# EAGLE board l298n_x1_v1 (EAGLE 5.06)
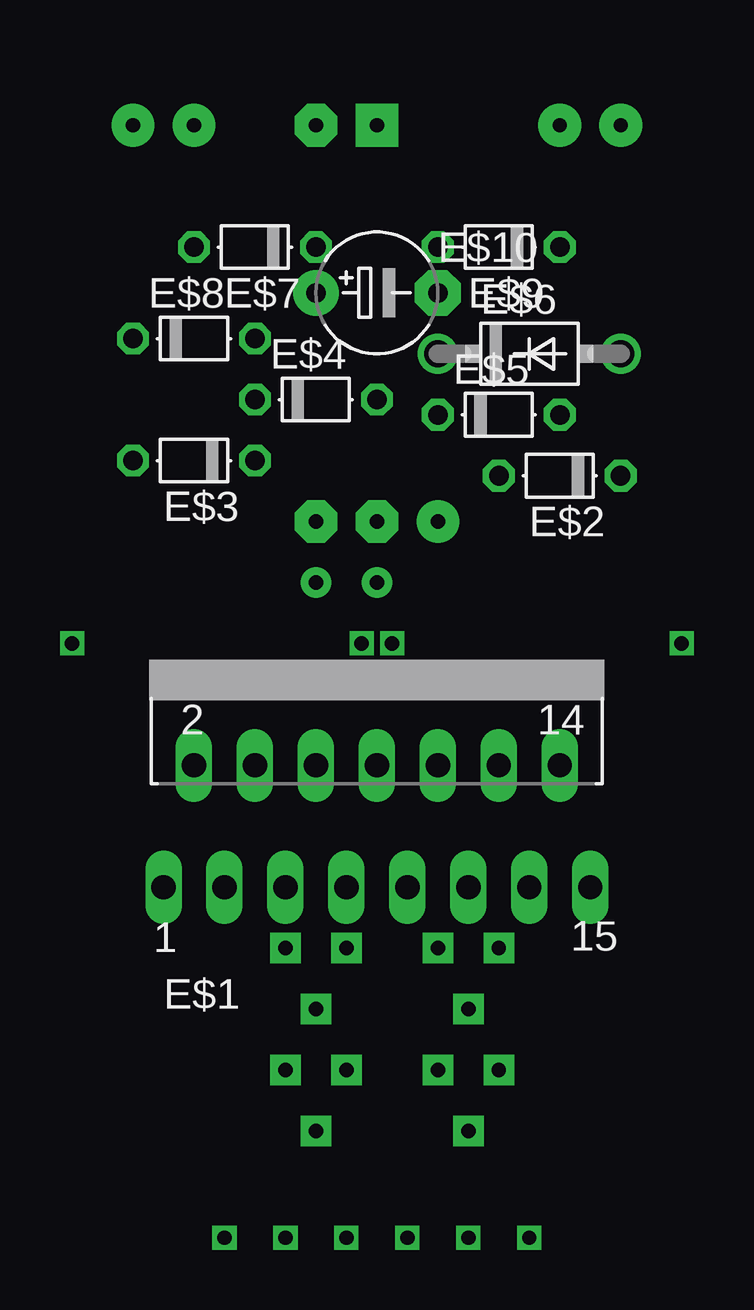
[diagram p0: board, top side]
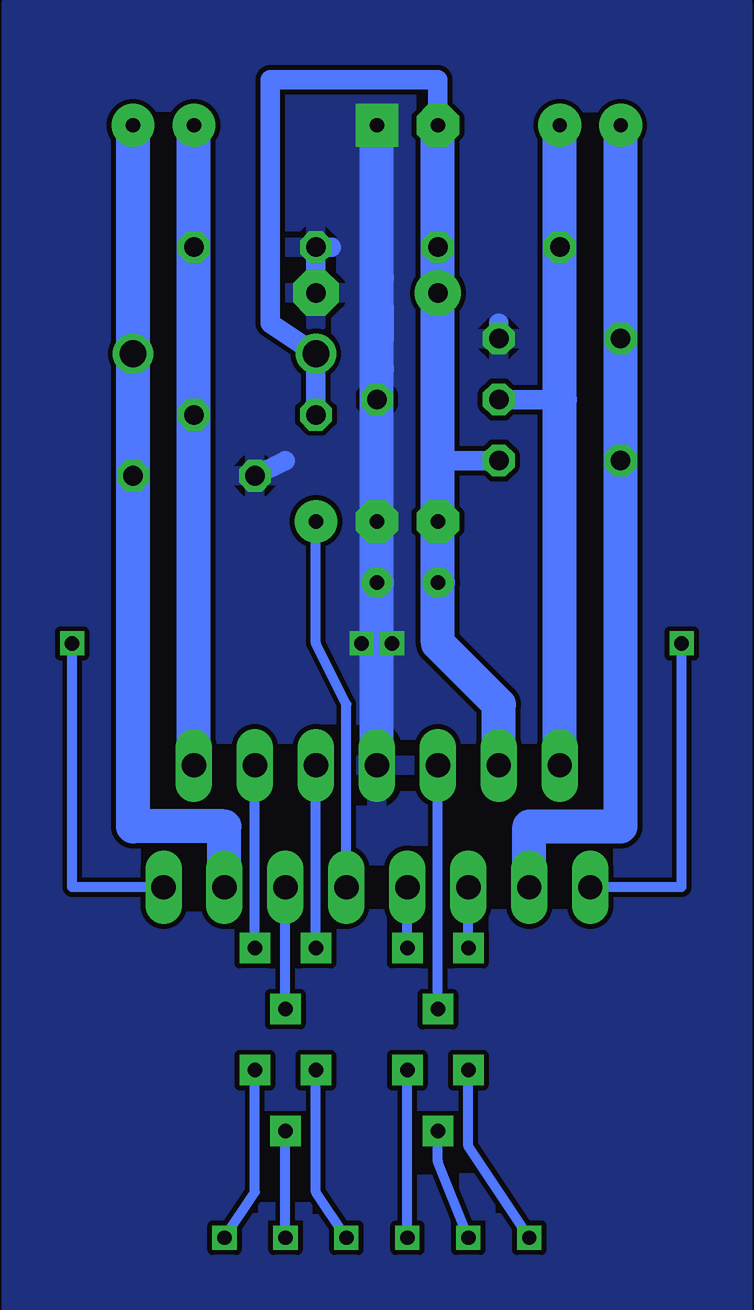
[diagram p1: board, bottom side, seen from below]

No outline drawn. Coordinates in mm, seen from the top.
Copper layers (1*16): Top 0.035mm / dielectric 1.5mm / Bottom 0.035mm
Design rules "default": minimum track width 10mil, minimum drill 24mil, track to track 8mil, track to pad 8mil, pad to pad 8mil, via to via 8mil, smd to smd 8mil, copper to edge 40mil, drill to drill 8mil, minimum pad ring 10mil, minimum via ring 8mil, stop-mask expansion 4mil, vias tented up to drill 0mil, thermal gap 10mil

## Footprints (pad centres in the part's own frame; a part is rotated, then mirrored left to right if it is on the bottom)
MULTIWATT-15 = drill 1.016 long: 1 -8.89,-7.62; 2 -7.62,-2.54; 3 -6.35,-7.62; 4 -5.08,-2.54; 5 -3.81,-7.62; 6 -2.54,-2.54; 7 -1.27,-7.62; 8 0,-2.54; 9 1.27,-7.62; 10 2.54,-2.54; 11 3.81,-7.62; 12 5.08,-2.54; 13 6.35,-7.62; 14 7.62,-2.54; 15 8.89,-7.62
D-5 = drill 0.813 octagon: A 2.54,0; C -2.54,0
DO41-7 = drill 1.118 round: A 3.81,0; C -3.81,0
E5-5 = drill 0.813 pad 1.905 round: + -2.54,0 | drill 0.813 pad 1.905 octagon: - 2.54,0

## Placement (x,y rotation side)
E$1  [MULTIWATT-15]  15.24,24.13 0 top
E$2  [D-5]  22.86,33.66 180 top
E$3  [D-5]  7.62,34.29 180 top
E$4  [D-5]  12.7,36.83 0 top
E$5  [D-5]  20.32,36.2 0 top
E$6  [DO41-7]  21.59,38.73 0 top
E$7  [D-5]  10.16,43.18 180 top
E$8  [D-5]  7.62,39.37 0 top
E$9  [D-5]  20.32,43.18 180 top
E$10  [E5-5]  15.24,41.27 0 top

## Library data of the parts
E$1 = ref-packages
E$2-E$9 = diode
E$10 = rcl

## Nets
GND: E$1.8 E$2.A E$8.A E$9.A E$10.-
S$1: E$1.1
S$2: E$1.15
S$4: E$1.3
S$5: E$1.2 E$4.C
S$6: E$1.4 E$3.C
S$7: E$1.14
S$9: E$1.6
S$11: E$1.12
S$12: E$1.11
S$13: E$1.10
S$14: E$1.13
S$15: E$1.9
S$18: E$1.5
S$20: E$1.7

## Tracks (layer width: path | path; a pad name or v marks a point on that pad's centre or on a via)
GND  (via drill 0.6, 0.6 pad 1.27, 0.6 pad 1.78)
  Bottom 0.813: E$8.A 10.16,40.01 | 17.14,43.18 E$9.A E$10.- | 19.05,34.29 E$2.A
  Bottom 1.422: 15.24,40.64 15.24,39.37 | 15.24,40.64 15.24,41.91 | 15.24,38.1 15.24,40.64 | 15.24,38.1 v15.24,48.26 | 15.24,38.1 v15.24,31.75 v15.24,29.21 E$1.8
  other vias: 14.61,26.67 15.88,26.67
  pour Bottom: 0,-1.27 0,53.34 30.48,53.34 30.48,-1.27
S$1  (via drill 0.6)
  Bottom 0.406: E$1.1 2.54,16.51 v2.54,26.67
S$2  (via drill 0.6)
  Bottom 0.406: E$1.15 27.94,16.51 v27.94,26.67
S$4  (via drill 0.6 pad 1.78)
  Bottom 1.422: v5.08,48.26 5.08,19.05 8.89,19.05 E$1.3
S$5  (via drill 0.6 pad 1.78)
  Bottom 0.813: 7.62,36.83 E$4.C
  Bottom 1.422: E$1.2 7.62,36.83 v7.62,48.26
S$6  (via drill 0.6 pad 1.27, 0.6 pad 1.78)
  Bottom 0.813: 17.78,36.83 17.78,38.73 19.68,40.01 19.68,50.16 12.7,50.16 v12.7,48.26 | 12.7,34.29 E$3.C
  Bottom 1.422: v12.7,48.26 12.7,34.29 v12.7,31.75 v12.7,29.21 12.7,26.67 10.16,24.13 E$1.4
S$7  (via drill 0.6 pad 1.78)
  Bottom 1.422: E$1.14 v22.86,48.26
S$8  (via drill 0.6, 0.6 pad 1.27)
  Bottom 0.406: v11.43,8.89 11.43,5.71 v8.89,1.91
S$9  (via drill 0.6 pad 1.27)
  Bottom 0.406: v12.7,11.43 E$1.6
S$10  (via drill 0.6, 0.6 pad 1.27)
  Bottom 0.406: v13.97,1.91 v13.97,8.89
S$11  (via drill 0.6 pad 1.27)
  Bottom 0.406: v20.32,13.97 E$1.12
S$12  (via drill 0.6 pad 1.27)
  Bottom 0.406: v19.05,11.43 E$1.11
S$13  (via drill 0.6 pad 1.27)
  Bottom 0.406: v17.78,13.97 E$1.10
S$14  (via drill 0.6 pad 1.78)
  Bottom 1.422: v25.4,48.26 25.4,19.05 21.59,19.05 E$1.13
S$15  (via drill 0.6 pad 1.78)
  Bottom 0.406: E$1.9 16.51,24.13 17.78,26.67 v17.78,31.75
S$18  (via drill 0.6 pad 1.27)
  Bottom 0.406: v11.43,13.97 E$1.5
S$19  (via drill 0.6, 0.6 pad 1.27)
  Bottom 0.406: v12.7,6.35 12.7,5.08 v11.43,1.91
S$20  (via drill 0.6 pad 1.27)
  Bottom 0.406: v13.97,13.97 E$1.7
S$21  (via drill 0.6, 0.6 pad 1.27)
  Bottom 0.406: v17.78,8.89 17.78,3.81 v16.51,1.91
S$22  (via drill 0.6, 0.6 pad 1.27)
  Bottom 0.406: v19.05,1.91 v19.05,6.35
S$23  (via drill 0.6, 0.6 pad 1.27)
  Bottom 0.406: v20.32,8.89 20.32,3.81 v21.59,1.91